# Altium PCB PCB_wzmacniacz.PcbDoc
Units mm, origin at the board's own origin, x right, y up, seen from the top; angles counter-clockwise.
Board outline 195.5 x 100 mm, 4 copper layers (TOP, VCC, VEE, BOT), stack 1.283 mm thick; 100 components, 47 nets, 227 pads, 0 vias.
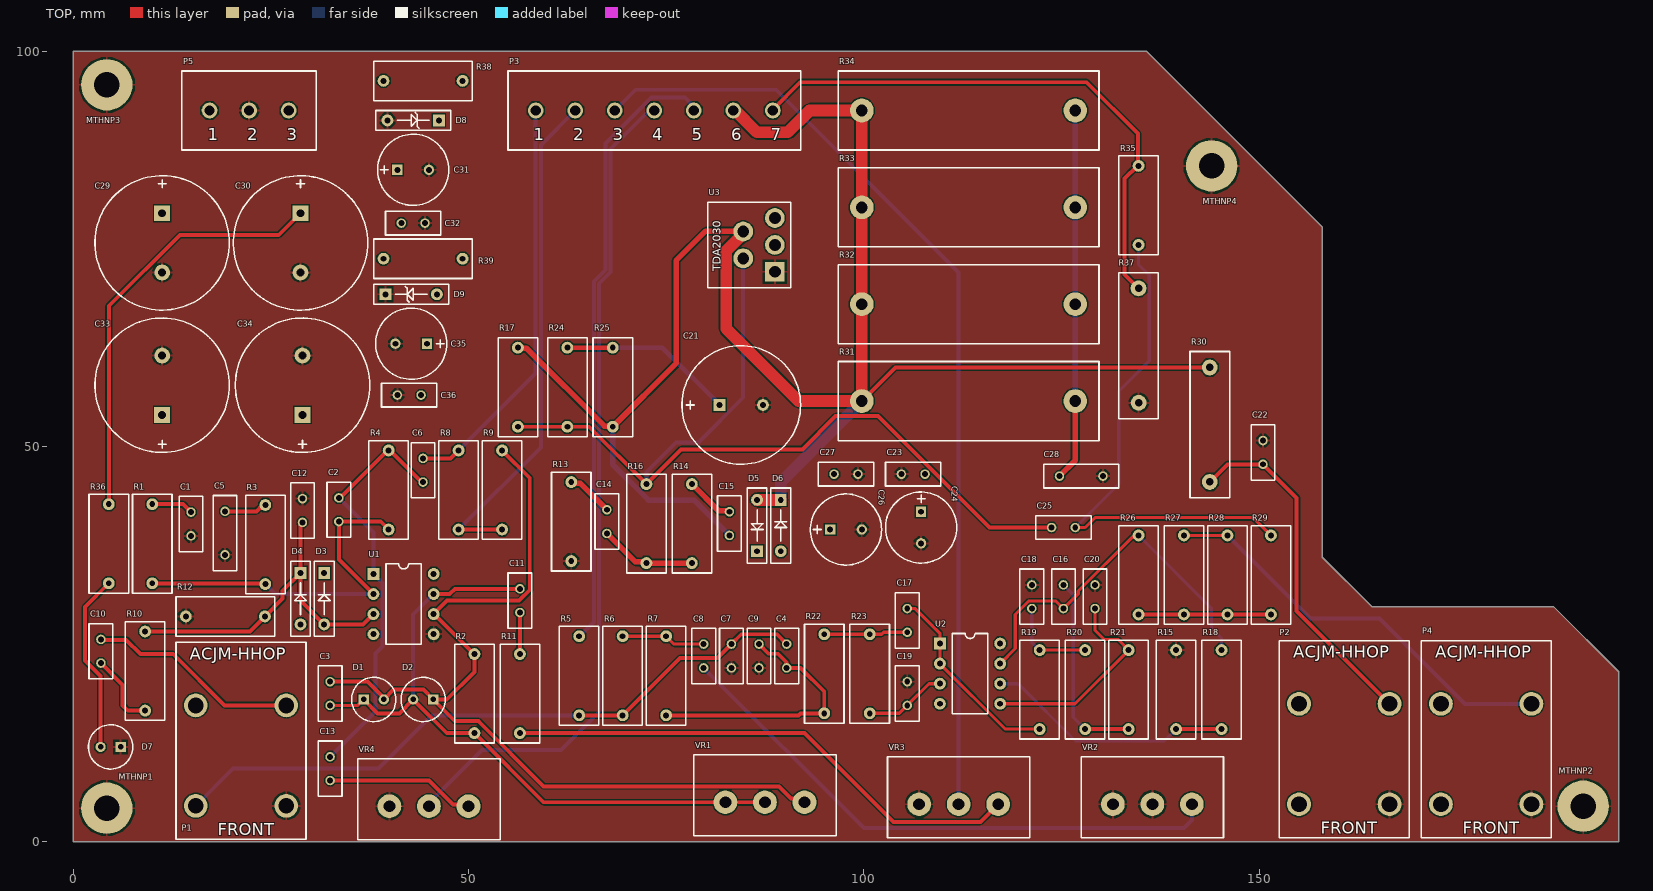
[diagram p0: TOP view]
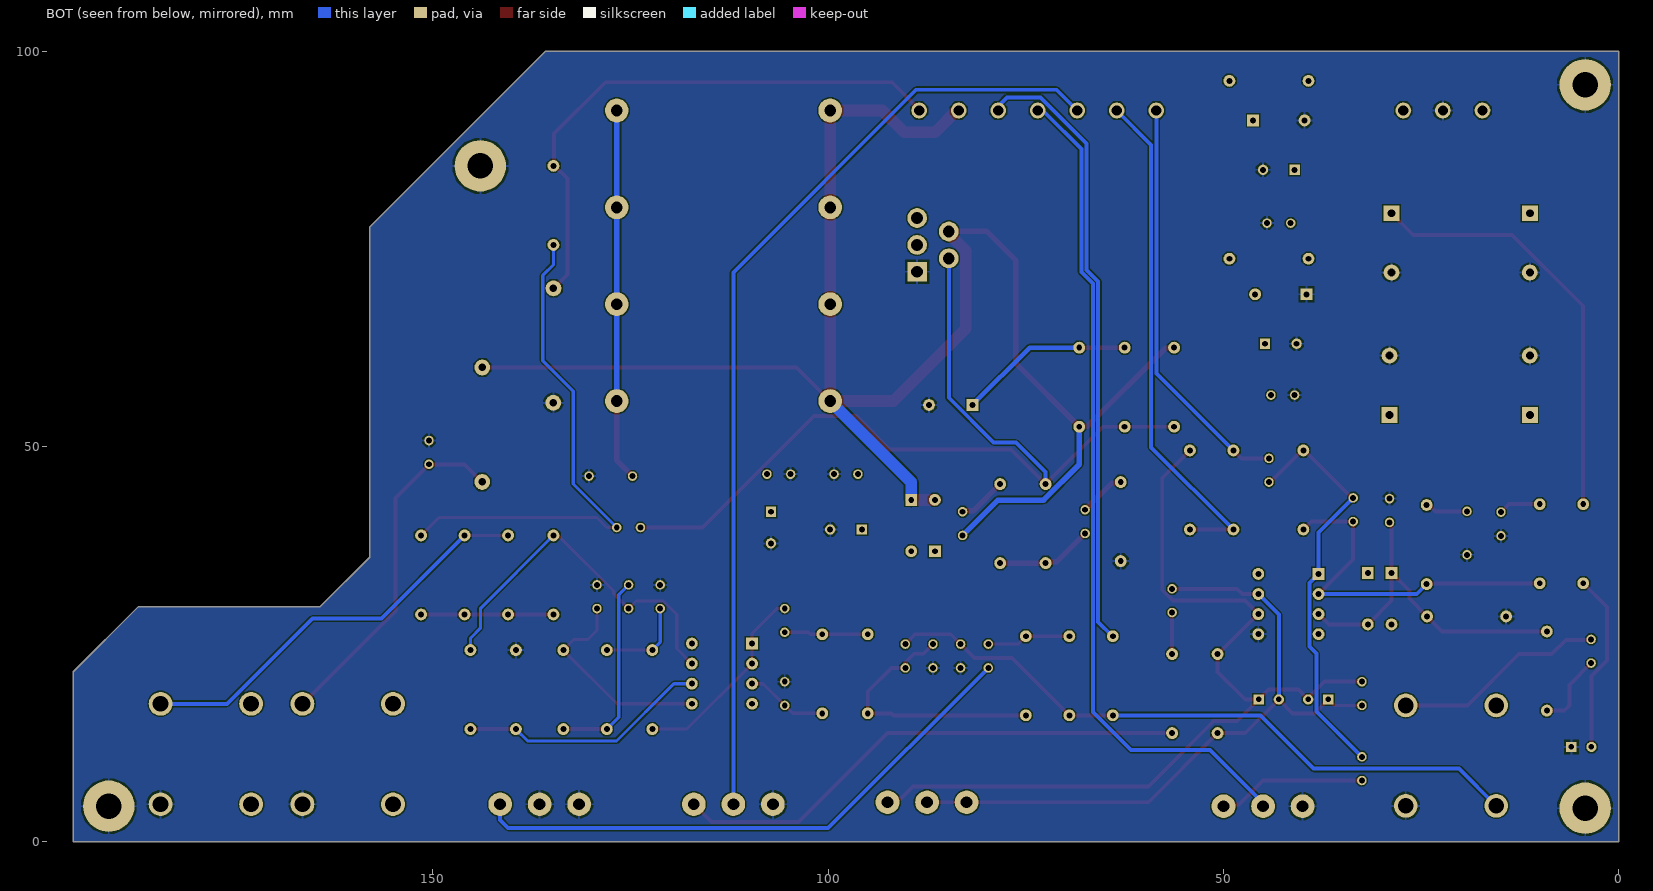
[diagram p1: BOT view, seen from below]
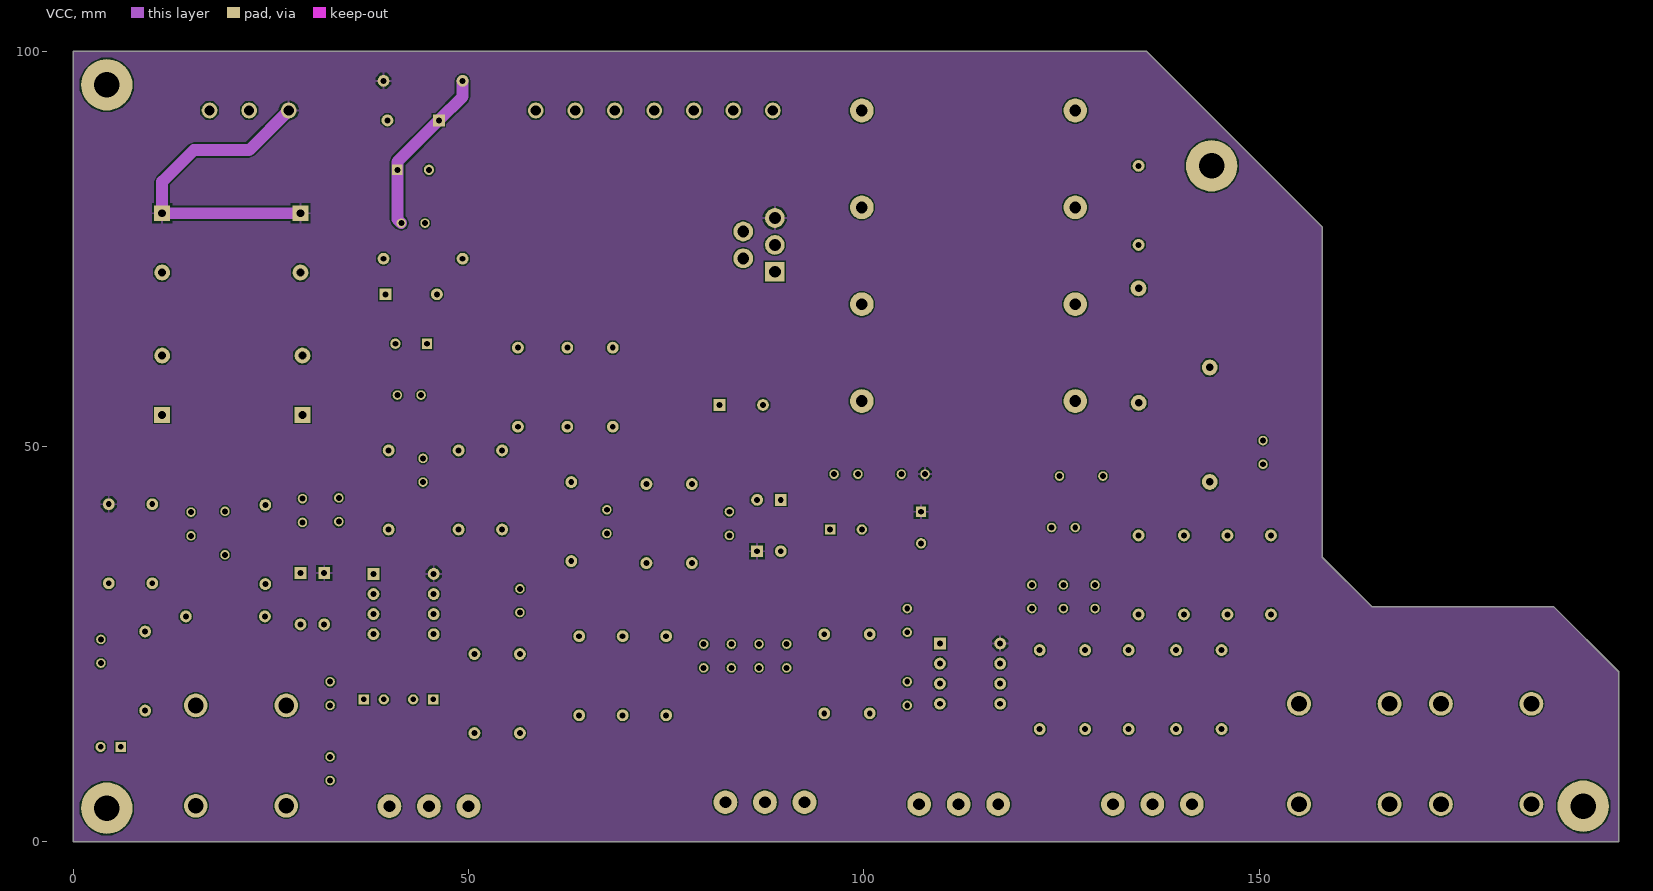
[diagram p2: VCC]
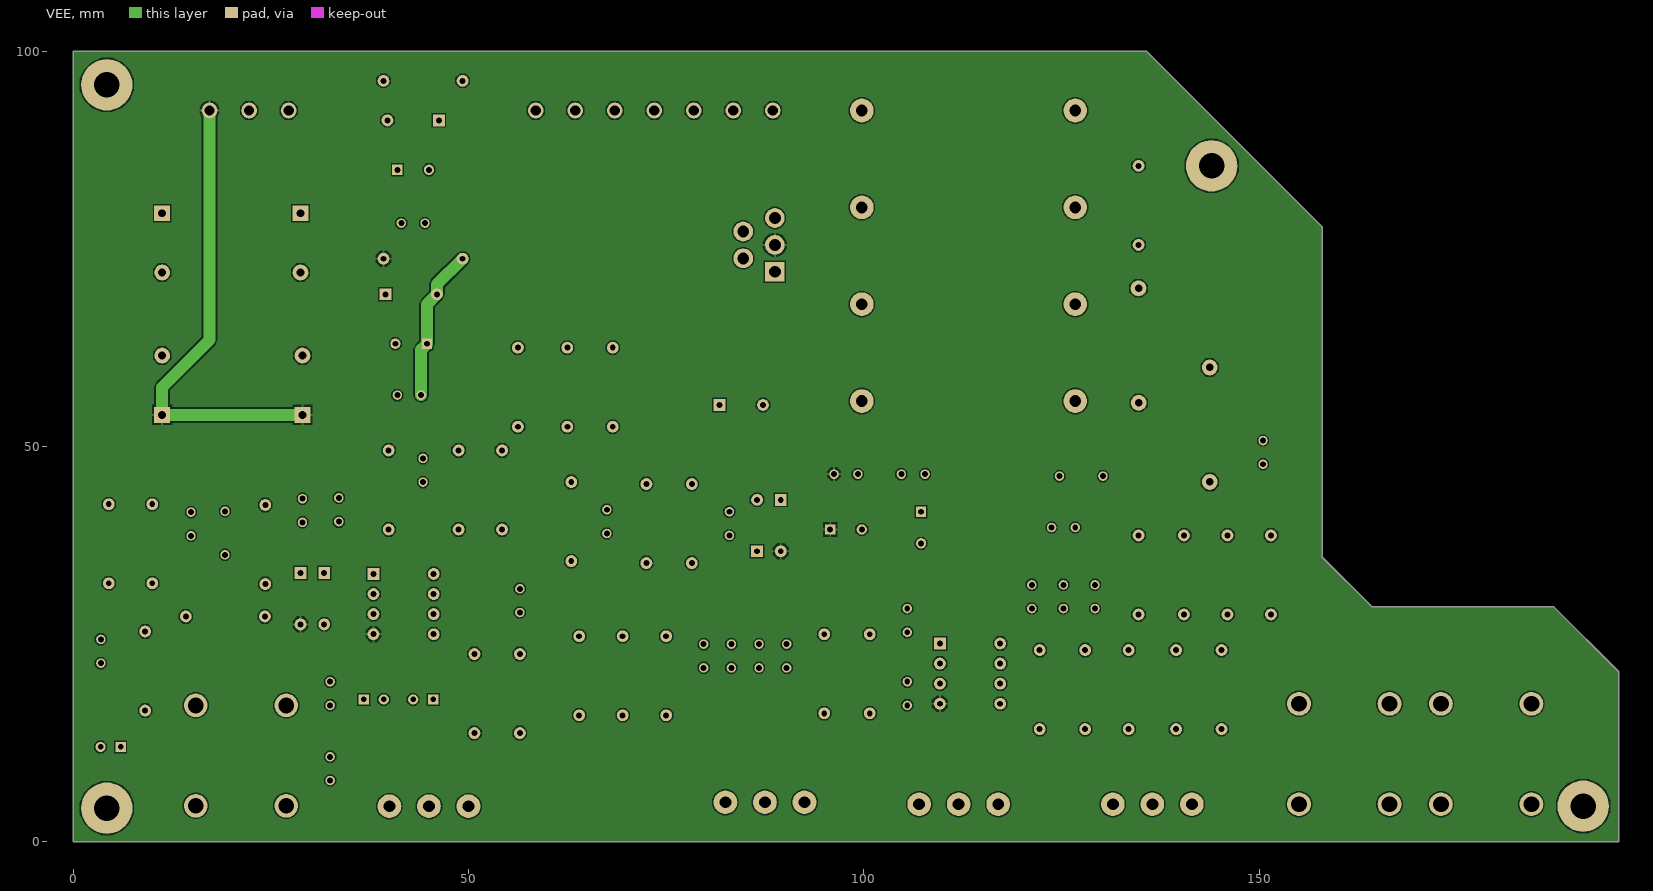
[diagram p3: VEE]
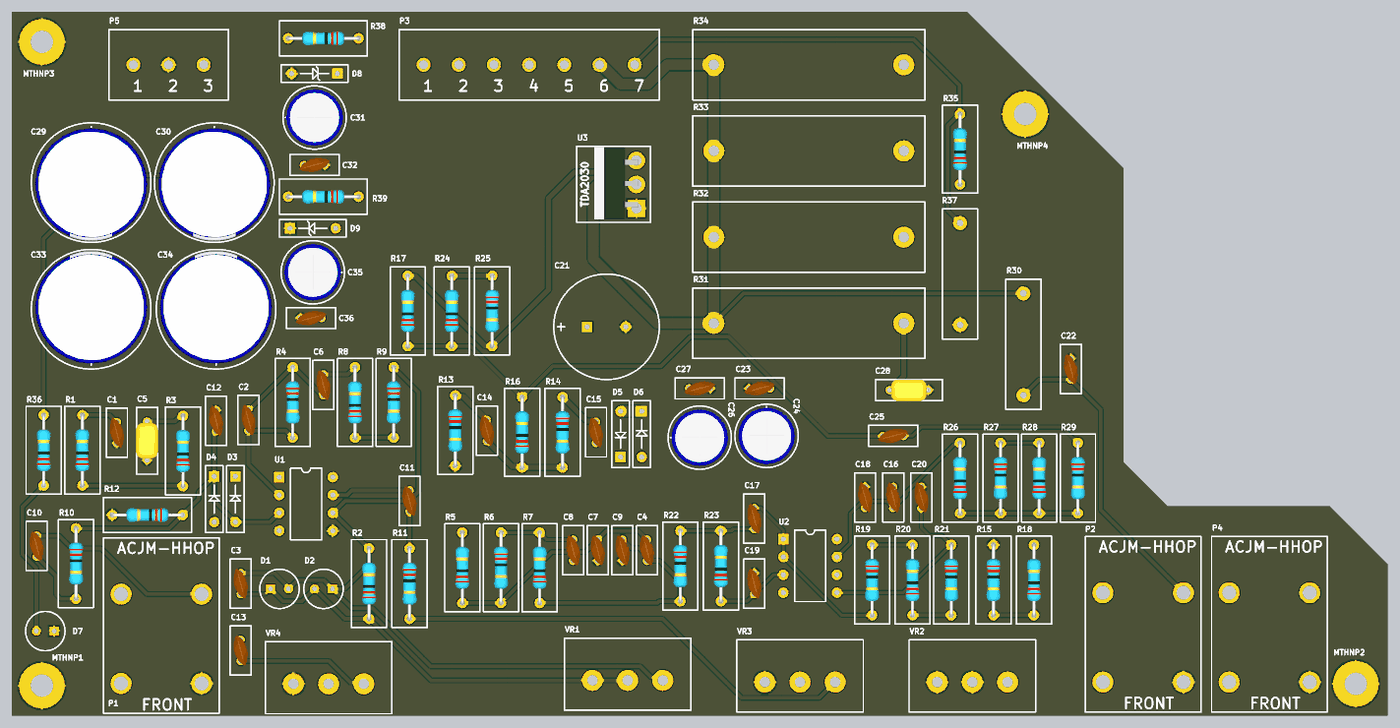
[diagram p4: 3D render of the assembled board from above, using the file's embedded part models]

## Layer stack, top to bottom
Top Solder: solder mask 0.0102, Solder Resist, Dk 3.5
TOP: signal copper 0.0356
Dielectric 2: prepreg 0.0711, PP-006, Dk 4.1
VCC: signal copper 0.035
Dielectric 1: core 1, FR-4, Dk 4.8
VEE: signal copper 0.035
Dielectric 3: prepreg 0.0711, PP-006, Dk 4.1
BOT: signal copper 0.0356
Bottom Solder: solder mask 0.0102, Solder Resist, Dk 3.5

## Board outline
195.5,0 195.5,21.5 187.25,29.75 164.25,29.75 158,36 158,77.75 135.75,100 0,100 0,0

## Design rules (kind name [scope] priority, off if disabled: settings)
Clearance [All] p1: gap=0.15 ignorepadtopadclearanceinfootprint=FALSE
Height [All] p1: minheight=0 maxheight=42 prefheight=12.7
HoleSize [All] p1: absolutevalues=TRUE maxlimit=3.5 minlimit=0.025 maxpercent=80.000 minpercent=20.000
PolygonConnect [All] p1: connectstyle=Relief reliefconductorwidth=0.3 reliefentries=4 polygonreliefangle="90 Angle" airgapwidth=0.254
RoutingVias [All] p1: holewidth=0.711 width=1.27 viastyle="Through Hole" minholewidth=0.711 minwidth=1.27 maxholewidth=0.711 maxwidth=1.27
SolderMaskExpansion [All] p1: expansion=0.102 istentingtop=FALSE
Width [All] p1: maxlimit=5.5 minlimit=0.15 preferedwidth=5.5 toplayer_minwidth=0.4 toplayer_maxwidth=1.6 toplayer_prefwidth=0.5 midlayer1_minwidth=1.5 midlayer2_prefwidth=0.25 bottomlayer_minwidth=0.4 bottomlayer_maxwidth=1.6 bottomlayer_prefwidth=0.5 minimp=50.000000 maximp=50.000000 favimp=50.000000
28 further rules are at their usual default settings.

## Components (designator, comment, footprint, x,y, rotation, side; value= is the part's Value field where it differs from the comment)
C1 "CAP ceramic 2,5mm generic" "CAPACITOR THT 2,54MM - DUPLICATE" 14.9,38.7 r90 top
C2 "CAP ceramic 2,5mm generic" "CAPACITOR THT 2,54MM - DUPLICATE" 33.6,40.5 r90 top
C3 "CAP ceramic 2,5mm generic" "CAPACITOR THT 2,54MM - DUPLICATE" 32.5,20.25 r270 top
C4 "CAP ceramic 2,5mm generic" "CAPACITOR THT 2,54MM - DUPLICATE" 90.25,25 r270 top
C5 "CAP ceramic 5mm generic_1" "CAPACITOR THT 5MM" 19.2,36.3 r90 top
C6 "CAP ceramic 2,5mm generic" "CAPACITOR THT 2,54MM - DUPLICATE" 44.25,45.5 r90 top
C7 "CAP ceramic 2,5mm generic" "CAPACITOR THT 2,54MM - DUPLICATE" 83.25,22 r90 top
C8 "CAP ceramic 2,5mm generic" "CAPACITOR THT 2,54MM - DUPLICATE" 79.75,22 r90 top
C9 "CAP ceramic 2,5mm generic" "CAPACITOR THT 2,54MM - DUPLICATE" 86.75,22 r90 top
C10 "CAP ceramic 2,5mm generic" "CAPACITOR THT 2,54MM - DUPLICATE" 3.5,25.6 r270 top
C11 "CAP ceramic 2,5mm generic" "CAPACITOR THT 2,54MM - DUPLICATE" 56.5,32 r270 top
C12 "CAP ceramic 2,5mm generic" "CAPACITOR THT 2,54MM - DUPLICATE" 29,43.4 r270 top
C13 "CAP ceramic 2,5mm generic" "CAPACITOR THT 2,54MM - DUPLICATE" 32.5,10.75 r270 top
C14 "CAP ceramic 2,5mm generic" "CAPACITOR THT 2,54MM - DUPLICATE" 67.5,42 r270 top
C15 "CAP ceramic 2,5mm generic" "CAPACITOR THT 2,54MM - DUPLICATE" 83,41.75 r270 top
C16 "CAP ceramic 2,5mm generic" "CAPACITOR THT 2,54MM - DUPLICATE" 125.25,29.5 r90 top
C17 "CAP ceramic 2,5mm generic" "CAPACITOR THT 2,54MM - DUPLICATE" 105.5,26.5 r90 top
C18 "CAP ceramic 2,5mm generic" "CAPACITOR THT 2,54MM - DUPLICATE" 121.25,29.5 r90 top
C19 "CAP ceramic 2,5mm generic" "CAPACITOR THT 2,54MM - DUPLICATE" 105.5,17.25 r90 top
C20 "CAP ceramic 2,5mm generic" "CAPACITOR THT 2,54MM - DUPLICATE" 129.25,29.5 r90 top
C21 "Cap electrolytic fi13 generic" "CAPACITOR ELECTROLYTIC THT FI13" 81.75,55.25 r0 top
C22 "CAP ceramic 2,5mm generic" "CAPACITOR THT 2,54MM - DUPLICATE" 150.5,47.75 r90 top
C23 "CAP ceramic 2,5mm generic" "CAPACITOR THT 2,54MM - DUPLICATE" 107.75,46.5 r180 top
C24 "Cap electrolytic fi8 generic" "CAPACITOR ELECTROLYTIC THT FI8" 107.25,41.75 r270 top
C25 "CAP ceramic 2,5mm generic" "CAPACITOR THT 2,54MM - DUPLICATE" 126.75,39.75 r180 top
C26 "Cap electrolytic fi8 generic" "CAPACITOR ELECTROLYTIC THT FI8" 95.75,39.5 r0 top
C27 "CAP ceramic 2,5mm generic" "CAPACITOR THT 2,54MM - DUPLICATE" 96.25,46.5 r0 top
C28 "CAP ceramic 5mm generic_1" "CAPACITOR THT 5MM" 130.25,46.25 r180 top
C29 "Cap electrolytic fi16 generic_1" "CAPACITOR ELECTROLYTIC THT FI16X40" 11.25,79.5 r270 top
C30 "Cap electrolytic fi16 generic_1" "CAPACITOR ELECTROLYTIC THT FI16X40" 28.75,79.5 r270 top
C31 "Cap electrolytic fi8 generic" "CAPACITOR ELECTROLYTIC THT FI8" 41,85 r0 top
C32 "CAP ceramic 2,5mm generic" "CAPACITOR THT 2,54MM - DUPLICATE" 44.5,78.25 r180 top
C33 "Cap electrolytic fi16 generic_1" "CAPACITOR ELECTROLYTIC THT FI16X40" 11.25,54 r90 top
C34 "Cap electrolytic fi16 generic_1" "CAPACITOR ELECTROLYTIC THT FI16X40" 29,54 r90 top
C35 "Cap electrolytic fi8 generic" "CAPACITOR ELECTROLYTIC THT FI8" 44.75,63 r180 top
C36 "CAP ceramic 2,5mm generic" "CAPACITOR THT 2,54MM - DUPLICATE" 44,56.5 r180 top
D1 "Red" "LED DIODE 5MM THT - DUPLICATE" 36.75,18 r0 top
D2 "Green" "LED DIODE 5MM THT - DUPLICATE" 45.54,18 r180 top
D3 "1N4148" 1N4148 31.75,34 r270 top
D4 "1N4148" 1N4148 28.75,34 r270 top
D5 "1N4148" 1N4148 86.5,36.75 r90 top
D6 "1N4148" 1N4148 89.5,43.25 r270 top
D7 "Red" "LED DIODE 5MM THT - DUPLICATE" 6,12 r180 top
D8 "15V 0,4W" "ZENER 15V 0.4W" 46.25,91.25 r180 top
D9 "15V 0,4W" "ZENER 15V 0.4W" 39.5,69.25 r0 top
MTHNP1 "MTHNP3.2mm" "MTH NP 3.2MM" 4.25,4.25 r0 top
MTHNP2 "MTHNP3.2mm" "MTH NP 3.2MM" 191,4.5 r0 top
MTHNP3 "MTHNP3.2mm" "MTH NP 3.2MM" 4.25,95.75 r0 top
MTHNP4 "MTHNP3.2mm" "MTH NP 3.2MM" 144,85.5 r0 top
P1 "Jack 6.3 in" "AMPHENOL ACJM-HHOP" 15.5,4.55 r270 top
P2 "Headphones" "AMPHENOL ACJM-HHOP" 155.05,4.75 r270 top
P3 "7pin BUS" "7 PIN BUS" 58.5,92.5 r270 top
P4 "Jack in" "AMPHENOL ACJM-HHOP" 173,4.75 r270 top
P5 "3pin BUS" "3 PIN BUS" 17.25,92.5 r270 top
R1 "Resistor 1/4W generic" "RESISTOR THT 0,25W" 8.4,43.7 r270 top
R2 "Resistor 1/4W generic" "RESISTOR THT 0,25W" 49.15,24.75 r270 top
R3 "Resistor 1/4W generic" "RESISTOR THT 0,25W" 22.7,43.6 r270 top
R4 "Resistor 1/4W generic" "RESISTOR THT 0,25W" 41.5,38.5 r90 top
R5 "Resistor 1/4W generic" "RESISTOR THT 0,25W" 62.4,27 r270 top
R6 "Resistor 1/4W generic" "RESISTOR THT 0,25W" 71.1,15 r90 top
R7 "Resistor 1/4W generic" "RESISTOR THT 0,25W" 73.4,27 r270 top
R8 "Resistor 1/4W generic" "RESISTOR THT 0,25W" 47.15,50.5 r270 top
R9 "Resistor 1/4W generic" "RESISTOR THT 0,25W" 55.85,38.5 r90 top
R10 "Resistor 1/4W generic" "RESISTOR THT 0,25W" 10.7,15.6 r90 top
R11 "Resistor 1/4W generic" "RESISTOR THT 0,25W" 58.1,12.75 r90 top
R12 "Resistor 1/4W generic" "RESISTOR THT 0,25W" 13.25,26.9 r0 top
R13 "Resistor 1/4W generic" "RESISTOR THT 0,25W" 64.6,34.5 r90 top
R14 "Resistor 1/4W generic" "RESISTOR THT 0,25W" 79.85,34.25 r90 top
R15 "Resistor 1/4W generic" "RESISTOR THT 0,25W" 141.1,13.25 r90 top
R16 "Resistor 1/4W generic" "RESISTOR THT 0,25W" 70.9,46.25 r270 top
R17 "Resistor 1/4W generic" "RESISTOR THT 0,25W" 54.65,63.5 r270 top
R18 "Resistor 1/4W generic" "RESISTOR THT 0,25W" 143.65,25.25 r270 top
R19 "Resistor 1/4W generic" "RESISTOR THT 0,25W" 123.85,13.25 r90 top
R20 "Resistor 1/4W generic" "RESISTOR THT 0,25W" 126.4,25.25 r270 top
R21 "Resistor 1/4W generic" "RESISTOR THT 0,25W" 135.1,13.25 r90 top
R22 "Resistor 1/4W generic" "RESISTOR THT 0,25W" 96.6,15.25 r90 top
R23 "Resistor 1/4W generic" "RESISTOR THT 0,25W" 99.15,27.25 r270 top
R24 "Resistor 1/4W generic" "RESISTOR THT 0,25W" 60.9,63.5 r270 top
R25 "Resistor 1/4W generic" "RESISTOR THT 0,25W" 69.85,51.5 r90 top
R26 "Resistor 1/4W generic" "RESISTOR THT 0,25W" 133.15,39.75 r270 top
R27 "Resistor 1/4W generic" "RESISTOR THT 0,25W" 142.1,27.75 r90 top
R28 "Resistor 1/4W generic" "RESISTOR THT 0,25W" 144.4,39.75 r270 top
R29 "Resistor 1/4W generic" "RESISTOR THT 0,25W" 153.1,27.75 r90 top
R30 "1W" "RESISTOR THT 1W" 143.765,45.519 r90 top
R31 "5W" "RESISTOR THT 5W" 99.75,55.75 r0 top
R32 "5W" "RESISTOR THT 5W" 99.75,68 r0 top
R33 "5W" "RESISTOR THT 5W" 99.75,80.25 r0 top
R34 "5W" "RESISTOR THT 5W" 99.75,92.5 r0 top
R35 "Resistor 1/4W generic" "RESISTOR THT 0,25W" 133.15,86.5 r270 top
R36 "Resistor 1/4W generic" "RESISTOR THT 0,25W" 2.9,43.7 r270 top
R37 "1W" "RESISTOR THT 1W" 134.75,70 r270 top
R38 "Resistor 1/4W generic" "RESISTOR THT 0,25W" 38.25,94.65 r0 top
R39 "Resistor 1/4W generic" "RESISTOR THT 0,25W" 38.25,72.15 r0 top
U1 "TL072" DIP8 37.98,33.88 r0 top
U2 "NE5532" DIP8 109.63,25.08 r0 top
U3 "TDA2030A" TDA2030A 88.75,72.1 r0 top
VR1 "VR generic" "VARIABLE RESISTOR" 87.5,5 r0 top
VR2 "VR generic" "VARIABLE RESISTOR" 136.5,4.75 r0 top
VR3 "VR generic" "VARIABLE RESISTOR" 112,4.75 r0 top
VR4 "VR generic" "VARIABLE RESISTOR" 45,4.5 r0 top

## Footprints (in the part's own frame and the unit in brackets; to place one, negate y for a bottom-side part, rotate by r counter-clockwise, add the part's x,y. Pads: shape width x height; smd on the part's side, far side on the other; paste and mask are expansions set on the pad)
1N4148 [mm]
  round 1.5 hole 0.75: A(6.5,0)
  rect 1.5x1.5 hole 0.75: K(0,0)
  silkscreen extent -1.5,-1.25 8,1.25
"3 PIN BUS" [mm] "5mm"
  round 2 hole 1.3: 1(0,0) 2(0,5) 3(0,10)
  silkscreen extent -5,-3.5 5,13.5
"7 PIN BUS" [mm]
  round 2 hole 1.3: 1(0,0) 2(0,5) 3(0,10) 4(0,15) 5(0,20) 6(0,25) 7(0,30)
  silkscreen extent -5,-3.5 5,33.5
"AMPHENOL ACJM-HHOP" [mm] "AMPHENOL ACJM-HHOP"
  round 3 hole 2: S(0,11.45) SN(0,0) T(-12.7,11.45) TN(-12.7,0)
  silkscreen extent -20.7,-2.5 4.25,13.95
"CAPACITOR ELECTROLYTIC THT FI8" [mm]
  rect 1.3x1.3 hole 0.75: 1(0,0)
  round 1.3 hole 0.75: 2(4,0)
  silkscreen extent -2.5,-4.5 6.5,4.5, body extent -2.03,-4.03 6.03,4.03, height 13.03
"CAPACITOR ELECTROLYTIC THT FI13" [mm]
  rect 1.5x1.5 hole 0.75: 1(0,0)
  round 1.5 hole 0.75: 2(5.5,0)
  silkscreen extent -4.75,-7.5 10.25,7.5
"CAPACITOR ELECTROLYTIC THT FI16X40" [mm]
  rect 2x2 hole 1: 1(0,0)
  round 2 hole 1: 2(7.5,0)
  silkscreen extent -4.75,-8.5 12.25,8.5, body extent -4,-8 12.01,8, height 41.01
"CAPACITOR THT 2,54MM - DUPLICATE" [mm]
  round 1.2 hole 0.75: 1(0,0) 2(3,0)
  silkscreen extent -2,-1.5 5,1.5, body extent -0.7,-1.03 3.7,1.03, height 4.57
"CAPACITOR THT 5MM" [mm]
  round 1.2 hole 0.75: 1(0,0) 2(5.5,0)
  silkscreen extent -2,-1.5 7.5,1.5, body extent -0.02,-1.58 5.57,1.61, height 7.81
DIP8 [mm]
  rect 1.5x1.5 hole 0.75: 1(0,0)
  round 1.5 hole 0.75: 2(0,-2.54) 3(0,-5.08) 4(0,-7.62) 5(7.62,-7.62) 6(7.62,-5.08) 7(7.62,-2.54) 8(7.62,0)
  silkscreen extent 1.58,-8.89 6.04,1.27
"LED DIODE 5MM THT - DUPLICATE" [mm]
  round 1.3 hole 0.7: A(2.54,0)
  rect 1.3x1.3 hole 0.7: K(0,0)
  silkscreen extent -1.53,-2.8 4.07,2.8
"MTH NP 3.2MM" [mm] "Mounting hole non plated 3.2mm"
  round 6.5 hole 3.2: 1(0,0)
"RESISTOR THT 0,25W" [mm]
  round 1.5 hole 0.75: 1(1,1.6) 2(11,1.6)
  silkscreen extent -0.25,-0.9 12.25,4.1, body extent 0.77,0.6 11.22,2.6, height 1
"RESISTOR THT 1W" [mm]
  round 2 hole 0.95: 1(0,0) 2(14.481,0.015)
  silkscreen extent -2,-2.5 16.5,2.5
"RESISTOR THT 5W" [mm]
  round 3 hole 1.5: 1(0,0) 2(27,0)
  silkscreen extent -3,-5 30,5
TDA2030A [mm] "TO220-5 package"
  rect 2.5x2.5 hole 1.5: 1(0,0)
  round 2.5 hole 1.5: 2(-4,1.7) 3(0,3.4) 4(-4,5.1) 5(0,6.8)
  silkscreen extent -8.5,-2 2,8.8, body extent -6,-1.6 0.3,8.7, height 22.6
"VARIABLE RESISTOR" [mm] "VR"
  round 3 hole 1.5: 1(-5,0) 2(0,0) 3(5,0)
  silkscreen extent -9,-4.25 9,6
"ZENER 15V 0.4W" [mm]
  round 1.5 hole 0.75: A(6.5,0)
  rect 1.5x1.5 hole 0.75: K(0,0)
  silkscreen extent -1.5,-1.25 8,1.25

## Part data
C1 C14 C18 C23 C27: Capacitance=100n
C2 C12: Capacitance=10p
C3: Capacitance=220p
C4: Capacitance=560p
C5: Capacitance=150n
C6 C11 C13 C22 C25: Capacitance=10u
C7 C32 C36: Capacitance=10n
C8 C10: Capacitance=22n
C9: Capacitance=1n
C15: Capacitance=4.7n
C16: Capacitance=1.5n
C17: Capacitance=470p
C19: Capacitance=47p
C20: Capacitance=2.2n
C21: Capacitance=1m
C24 C26 C31 C35: Capacitance=47u
C28: Capacitance=220n
C29 C30 C33 C34: Capacitance=10m
D1 D2 D7: library part "LED Diode"
D8 D9: library part "Zner 15V 0,4W"
MTHNP1 MTHNP2 MTHNP3 MTHNP4: library part "MTH NP 3.2mm", "Mounting hole non plated 3.2mm"
P1 P2 P4: library part "AMPHENOL ACJM-HHOP"
P3 P5: "raster 5mm"
R1 R5 R15 R18: Resistance=1k
R2 R8 R12 VR1: Resistance=1M
R3: Resistance=820
R4: Resistance=6k8
R6 R7: Resistance=47k
R9: Resistance=560
R10 R11: Resistance=10k
R13 R19: Resistance=390
R14 R20 R21 R22 R23: Resistance=100k
R16: Resistance=3k9
R17: Resistance=560k
R24 R25 R27 R28: Resistance=3k3
R26 R29: Resistance=330
R30: library part "Resistor 1W generic", Resistance=680, Power Rating=1W
R31: library part "Resistor 5W generic", Resistance=33, Power Rating=5W
R32 R33 R34: library part "Resistor 5W generic", Resistanceter 1=33, Power Rating=5W
R35: Resistance=1k5
R36: Resistance=2k2
R37: library part "Resistor 1W generic", Resistance=0.1, Power Rating=1W
R38 R39: Resistance=180
VR2: Resistance=50k
VR3 VR4: Resistance=5k

## Nets (pads, with @x,y where several pads share a name; then routed paths per layer and width w, separated by ;. In a path a pad name is that pad's centre, name@x,y a point inside that pad or via, vN(x,y) a via of type N, cw(c..) or ccw(c..) an arc to the next point about the centre after c; other vN are vias at no path point)
GND: C1.1 C5.1 C7.1 C9.1 C12.1 C18.2 C19.2 C20.2 C21.2 C22.2 C23.2 C24.2 C26.2 C27.2 C28.1 C29.2 C30.2 C31.2 C32.1 C33.2 C34.2 C35.2 C36.2 D7.K D8.A D9.K MTHNP1.1 MTHNP2.1 MTHNP3.1 MTHNP4.1 P1.S P2.S P4.S P5.2 R12.1 R13.1 R15.2 R37.2 U1.5 U3.1 VR2.1 VR2.2 VR3.1 VR4.1
NetC1_2: C1.2 R1.1 | length 5.3
  TOP w0.5: R1.1 13.9,42.7 C1.2
NetC2_1: C2.1 R1.2 R3.2 R4.1 U1.2 | length 46.2
  TOP w0.5: R1.2 10.05,32.65 24.25,32.65 R3.2 ; U1.2 33.6,35.72 C2.1 38.9,40.5 R4.1
  BOT w0.5: R3.2 25.56,31.34 U1.2
NetC2_2: C2.2 C6.1 C13.1 R4.2 U1.1 | length 52.6
  TOP w0.5: C2.2 33.75,43.5 39.75,49.5 R4.2 40.075,49.5 44.075,45.5 C6.1
  BOT w0.5: C13.1 38.24,16.49 38.24,23.803 39.13,24.693 39.13,32.73 U1.1 37.98,39.12 C2.2
NetC3_1: C3.1 D1.A D2.K R2.1 R9.2 U1.6 VR1.3 | length 116.1
  TOP w0.5: C3.1 37.25,20.25 39.29,18.21 D1.A 40.54,19.25 44.29,19.25 D2.K ; R9.2 57.75,46 57.75,31.836 56.414,30.5 47.3,30.5 U1.6 45.65,28.8 50.7,23.75 R2.1 50.75,21.5 47.25,18 D2.K ; VR1.3 92.034,5.466 90.784,5.466 89.25,7 59.5,7 51.25,15.25 48.29,15.25 D2.K
NetC3_2: C3.2 C11.1 D1.K D2.A R2.2 U1.7 VR1.1 VR1.2 | length 87.7
  TOP w0.4: C3.2 36,17.25 D1.K
  TOP w0.5: D1.K 38.5,16.25 41.25,16.25 D2.A 47.25,13.75 R2.2 59.5,5 VR1.1 VR1.2 ; U1.7 47.613,31.34 48.273,32 C11.1@56.472,32
  BOT w0.5: D2.A 43,28.74 U1.7
NetC4_1: C4.1 C7.2 P1.SN R5.2 R6.1 | length 84.3
  TOP w0.5: R5.2 R6.1 76.75,23.25 81.5,23.25 C7.2 84.5,26.25 89,26.25 C4.1
  BOT w0.5: P1.SN 20.2,9.25 38.59,9.25 45.34,16 R5.2
NetC4_2: C4.2 C9.2 R7.2 R22.1 | length 34.2
  TOP w0.5: R7.2@75.125,16.125 R7.2 91.75,16 92,16.25 R22.1 95,19 92,22 C4.2 90.25,22.707 89.171,23.787 87.963,23.787 C9.2
NetC5_2: C5.2 R3.1 | length 5.4
  TOP w0.5: C5.2 23.163,41.8 23.963,42.6 R3.1
NetC6_2: C6.2 P3.1 R8.1 | length 52
  TOP w0.5: C6.2 47.75,48.5 R8.1
  BOT w0.5: R8.1 58.5,59.25 P3.1
NetC8_1: C8.1 VR2.3 | length 72.6
  BOT w0.5: C8.1 100,1.75 140.5,1.75 141.5,2.75 VR2.3
NetC8_2: C8.2 R6.2 R7.1 | length 10.7
  TOP w0.4: R6.2 R7.1 76,25 C8.2
NetC10_1: C10.1 P1.T | length 26.9
  TOP w0.5: C10.1 3.55,25.55 6.7,25.55 8.5,23.75 12.656,23.75 19.156,17.25 P1.T
NetC10_2: C10.2 R10.1 | length 9.6
  TOP w0.5: C10.2 6.25,19.85 6.25,17.25 6.9,16.6 R10.1
NetC11_2: C11.2 R11.2 | length 5.2
  TOP w0.5: R11.2 C11.2
NetC12_2: C12.2 D3.A D4.K R10.2 R12.2 U1.3 | length 44.3
  TOP w0.5: R10.2 22.35,26.6 R12.2 26.5,30.75 26.5,31.75 D4.K ; C12.2 29,40.211 28.75,39.961 D4.K ; U1.3 36.68,27.5 D3.A 28.75,30.5 D4.K
NetC13_2: C13.2 VR4.3 | length 18.8
  TOP w0.5: C13.2 45,7.75 48.043,4.707 49.793,4.707 VR4.3
NetC14_1: C14.1 R13.2 | length 5.9
  TOP w0.7: R13.2 63.153,45.347 64.153,45.347 C14.1
NetC14_2: C14.2 R14.1 R16.2 | length 12.3
  TOP w0.7: C14.2 71.097,35.403 72.347,35.403 R16.2 R14.1
NetC15_1: C15.1 R14.2 | length 6.2
  TOP w0.7: R14.2 81.654,41.846 82.904,41.846 C15.1
NetC15_2: C15.2 D5.A D6.K P3.6 R17.1 R25.1 R30.2 R31.1 R32.1 R33.1 R34.1 U3.4 | length 228.9
  TOP w0.5: R31.1 104,60 R30.2
  TOP w0.7: R17.1 56.323,62.427 57.323,62.427 67.177,52.573 68.177,52.573 R25.1 76.25,60.5 76.25,73.5 80,77.25 84.7,77.25 U3.4 ; D5.A@86.347,43.097 D5.A
  TOP w1: P3.6 P3.6@83.736,92.5
  TOP w1.5: P3.6@83.736,92.5 86.486,89.75 90.39,89.75 93.14,92.5 R34.1 R33.1 R32.1 R31.1 91.75,55.75 82.6,64.9 82.6,74.779 84.75,76.929 U3.4 ; D5.A D6.K
  BOT w0.7: R25.1 68.25,47.732 72.77,43.212 78.538,43.212 C15.2
  BOT w1.5: D6.K 89.5,45.5 R31.1
NetC16_1: C16.1 R18.1 R26.1 U2.7 | length 46.6
  TOP w0.4: U2.7 119.158,24.448 119.158,28.752 120.856,30.45 124.3,30.45 C16.1 127.13,31.38 127.13,31.723 133.946,38.54 134.54,38.54 R26.1
  BOT w0.4: R26.1 144,29.5 144,27 145.25,25.75 R18.1
NetC16_2: C16.2 R20.2 R21.1 | length 24.9
  TOP w0.5: R20.2 R21.1
  BOT w0.4: C16.2 126.5,31.25 126.5,15.75 R20.2
NetC17_1: C17.1 R22.2 R23.1 | length 10.6
  TOP w0.4: R22.2 R23.1 102.25,26.25 102.5,26.5 C17.1
NetC17_2: C17.2 R19.1 U2.1 U2.2 | length 25.3
  TOP w0.4: C17.2 106.5,29.5 109.63,26.37 U2.1 U2.2 117.92,14.25 R19.1
NetC18_1: C18.1 R19.2 R20.1 | length 11.4
  TOP w0.4: R19.2 R20.1
  BOT w0.4: C18.1 121.25,25.25 R19.2
NetC19_1: C19.1 R23.2 U2.3 | length 10.4
  TOP w0.4: R23.2 104.5,16.25 C19.1 108.25,20 U2.3
NetC20_1: C20.1 R21.2 U2.5 | length 27.1
  TOP w0.4: U2.5 126.71,17.46 R21.2 132.153,25.597 130.387,25.597 129.25,26.734 C20.1
NetC21_1: C21.1 R24.1 R25.2 | length 22.3
  TOP w0.6: R24.1 R25.2
  BOT w0.6: R25.2 74.5,62.5 C21.1
NetC22_1: C22.1 P2.T R30.1 | length 44.6
  TOP w0.5: R30.1 145.996,47.75 C22.1 154.75,43.5 154.75,29.2 P2.T
NetC25_1: C25.1 R29.2 R35.2 | length 66.4
  TOP w0.4: C25.1 128,39.75 129.25,41 149.25,41 R29.2
  BOT w0.4: C25.1 132.25,45.25 132.25,57 136.1,60.85 136.1,71.647 134.75,72.997 R35.2
NetC25_2: C25.2 R16.1 R17.2 R24.2 U3.2 | length 115.2
  TOP w0.5: R17.2 R24.2 65.25,52.5 R16.1 76.896,49.646 92.229,49.646 96.433,53.85 101.814,53.85 115.914,39.75 C25.2
  BOT w0.5: R16.1 72.5,46.75 76.25,50.5 79.066,50.5 84.75,56.184 U3.2
NetC28_2: C28.2 R31.2 R32.2 R33.2 R34.2 | length 47.1
  TOP w0.7: C28.2 126.75,48.25 R31.2
  BOT w0.7: R31.2 R32.2 R33.2 R34.2
NetC31_1: C31.1 C32.2 D8.K R38.2 | length 21.6
  VCC w1.5: C32.2 41,78.75 C31.1 41,86 D8.K 49.25,94.25 R38.2
NetC35_1: C35.1 C36.1 D9.A R39.2 | length 19.4
  VEE w1.5: C36.1 44,62.25 C35.1 44.75,68 D9.A 46,70.5 R39.2
NetD7_A: D7.A R36.2 | length 22.8
  TOP w0.5: D7.A 3.46,20.943 1.5,22.903 1.5,29.7 R36.2
NetP3_2: P3.2 R8.2 R9.1 | length 64.6
  TOP w0.5: R8.2 R9.1
  BOT w0.5: R8.2 59.15,49.9 59.15,88.15 P3.2
NetP3_3: P3.3 VR3.2 | length 121.4
  BOT w0.5: P3.3 71.126,95.126 88.874,95.126 112,72 VR3.2
NetP3_4: P3.4 VR4.2 | length 106.1
  BOT w0.5: VR4.2 45,4.915 51.686,11.601 61.703,11.601 66.5,16.398 66.5,70.605 67.975,72.08 67.975,87.626 72.562,92.213 73.213,92.213 P3.4
NetP3_5: P3.5 R5.1 | length 78.3
  BOT w0.5: R5.1 64.048,26 65.85,27.802 65.85,70.874 67.325,72.349 67.325,88.33 73.15,94.155 77.4,94.155 78.213,93.342 78.213,92.787 P3.5
NetP3_7: P3.7 R35.1 R37.1 | length 71.6
  TOP w0.5: P3.7 88.5,92.648 91.926,96.074 128.176,96.074 134.676,89.574 134.676,85.574 R35.1 134.602,85.5 133,83.898 133,71.75 R37.1
NetP4_T: P4.T R27.2 R28.1 | length 52.8
  TOP w0.4: R27.2 R28.1
  BOT w0.5: R28.1 156.506,28.244 165.256,28.244 176.05,17.45 P4.T
NetR11_1: R11.1 VR3.3 | length 66.1
  TOP w0.5: R11.1 92.5,13.75 103.75,2.5 114.75,2.5 VR3.3
NetR15_1: R15.1 R18.2 U2.6 | length 31.6
  TOP w0.5: R15.1 R18.2
  BOT w0.4: U2.6 119.524,20 126.774,12.75 138,12.75 R15.1
NetR26_2: R26.2 R27.1 R28.2 R29.1 | length 16.8
  TOP w0.5: R26.2 R27.1 R28.2 R29.1
VCC: C23.1 C24.1 C29.1 C30.1 D3.K D5.K P5.3 R36.1 R38.1 U1.8 U2.8 U3.5 | length 95.4
  TOP w0.5: R36.1 4.5,67.75 13.5,76.75 26,76.75 C30.1
  VCC w1.5: P5.3 22.25,87.5 15.25,87.5 11.25,83.5 C29.1 C30.1
VEE: C26.1 C27.1 C33.1 C34.1 D4.A D6.A P5.1 R39.1 U1.4 U2.4 U3.3 | length 58.7
  VEE w1.5: P5.1 17.25,63.5 11.25,57.5 C33.1 C34.1
pads on no net: P1.TN P2.SN P2.TN P4.SN P4.TN

## Polygon pours and split planes (outlines as drawn)
GND on BOT "GND_L04_P006" (solid, pour order 6): 195.5,0 195.5,21.5 187.25,29.75 164.25,29.75 158,36 158,77.75 135.75,100 0,100 0,0
VEE on VEE "VEE_L03_P004" (solid, pour order 4): 195.5,0 195.5,21.5 187.25,29.75 164.25,29.75 158,36 158,77.75 135.75,100 0,100 0,0
VCC on VCC "VCC_L02_P005" (solid, pour order 5): 195.5,0 195.5,21.5 187.25,29.75 164.25,29.75 158,36 158,77.75 135.75,100 0,100 0,0
GND on TOP "GND_L01_P007" (solid, pour order 7): 195.5,0 195.5,21.5 187.25,29.75 164.25,29.75 158,36 158,77.75 135.75,100 0,100 0,0

## Silkscreen, mask and mechanical layers (free items; w line width, h text height)
Mechanical 1:
  the board outline again, w0.2

## Text inside footprints (layer, text, board x,y; h text height)
P1: Top Overlay "ACJM-HHOP" at 14.754,23.054 h1.52; Top Overlay "FRONT" at 18.254,0.804 h1.52
P2: Top Overlay "ACJM-HHOP" at 154.304,23.254 h1.52; Top Overlay "FRONT" at 157.804,1.004 h1.52
P3: Top Overlay "1" at 58.254,88.754 h1.52; Top Overlay "2" at 63.254,88.754 h1.52; Top Overlay "3" at 68.254,88.754 h1.52; Top Overlay "4" at 73.254,88.754 h1.52; Top Overlay "5" at 78.254,88.754 h1.52; Top Overlay "6" at 83.254,88.754 h1.52; Top Overlay "7" at 88.254,88.754 h1.52
P4: Top Overlay "ACJM-HHOP" at 172.254,23.254 h1.52; Top Overlay "FRONT" at 175.754,1.004 h1.52
P5: Top Overlay "1" at 17.004,88.754 h1.52; Top Overlay "2" at 22.004,88.754 h1.52; Top Overlay "3" at 27.004,88.754 h1.52
U3: Top Overlay "TDA2030" at 81.896,72.154 h1 r90